# Altium PCB IcanStudioLive Controller mini fix.PcbDoc
Units mm, origin at the board's own origin, x right, y up, seen from the top; angles counter-clockwise.
Board outline 276.26 x 255.44 mm, 2 copper layers (Top Layer, Bottom Layer); 24 components, 42 nets, 133 pads, 2 vias.
Unrouted connection lines stored in the file: 2.
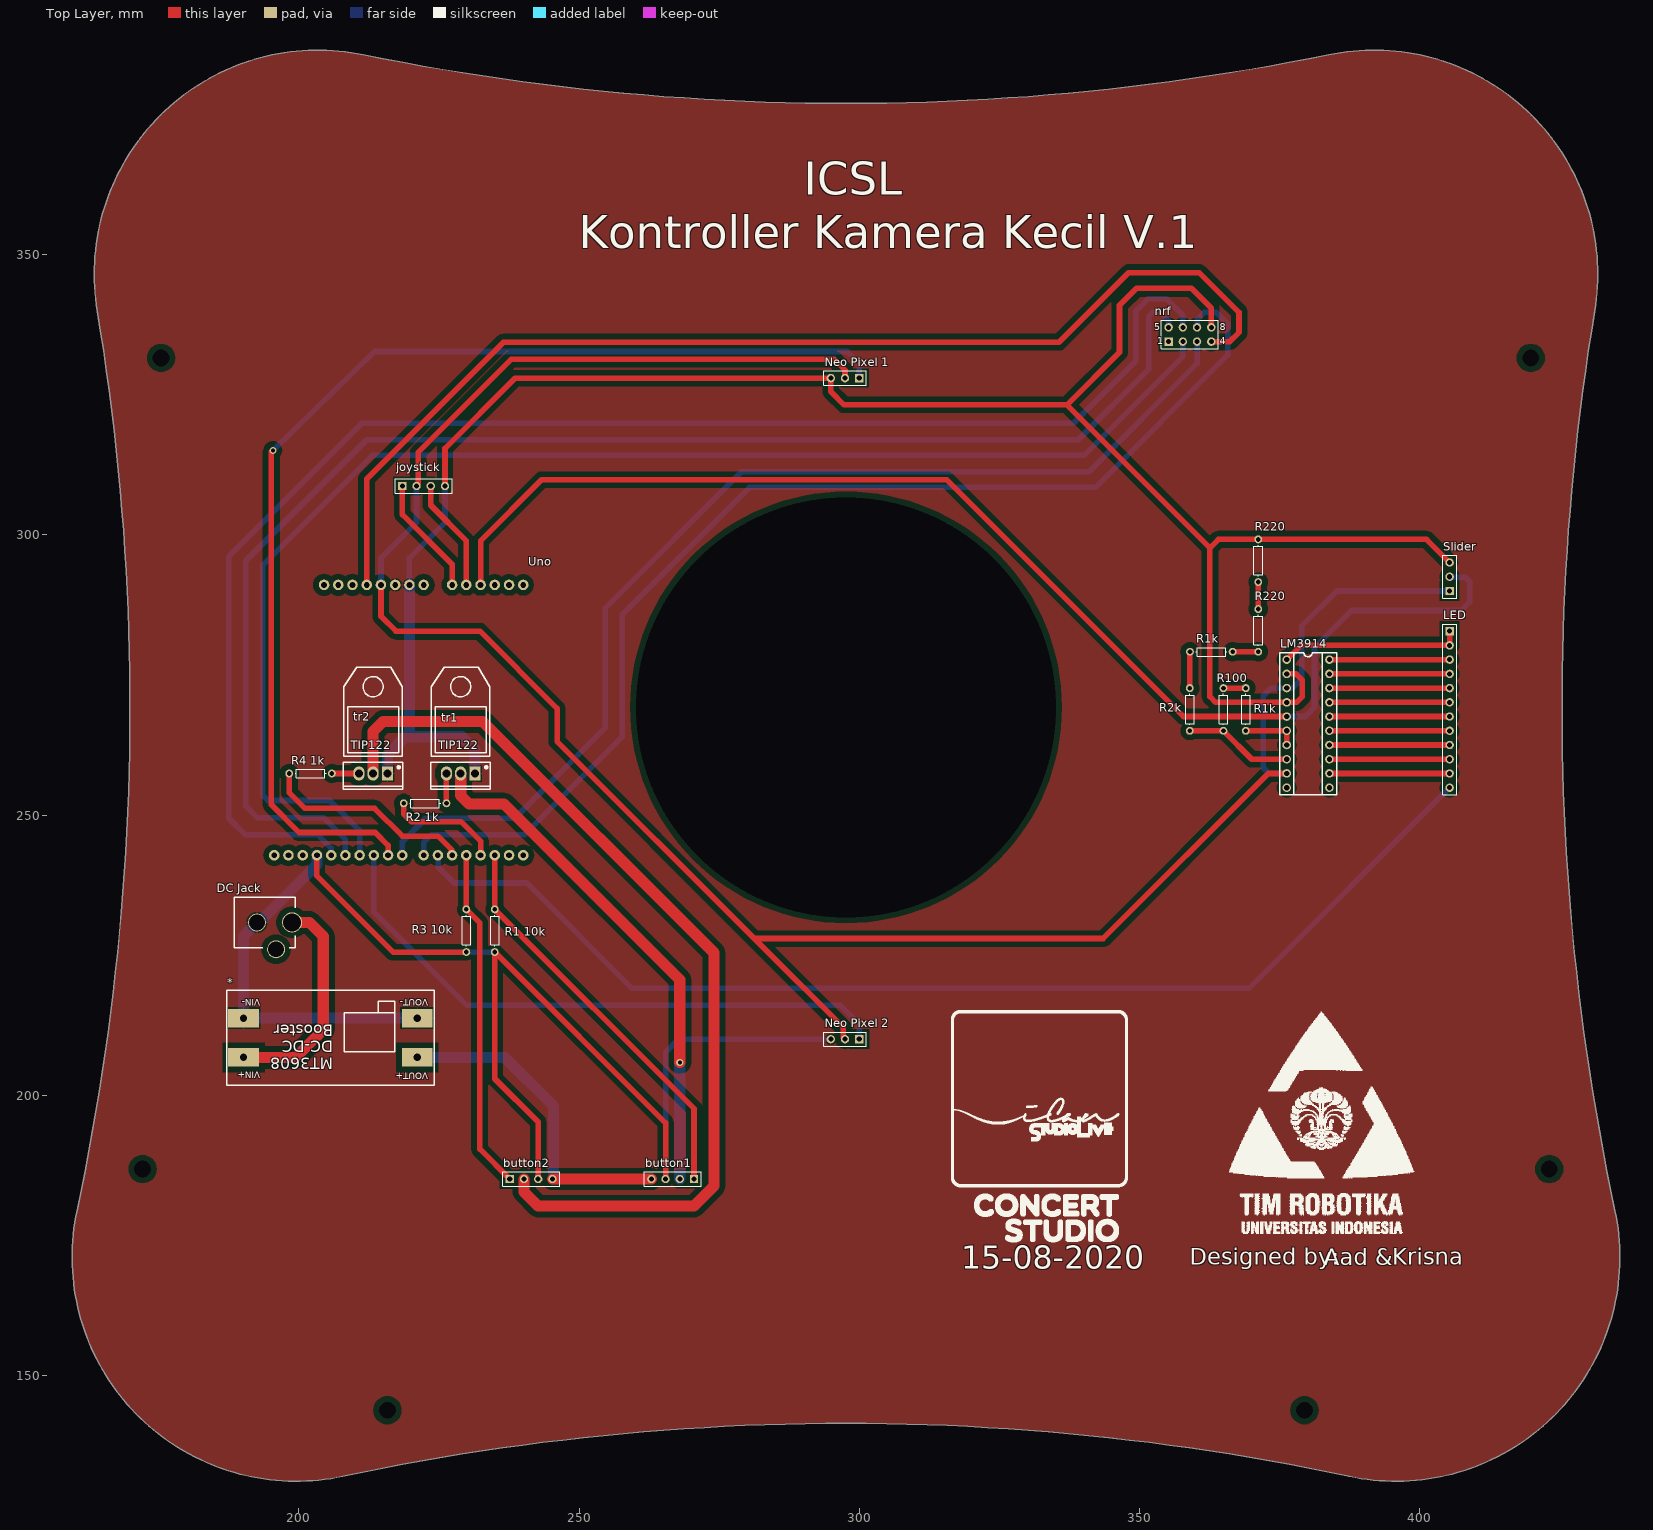
[diagram p0: Top Layer view]
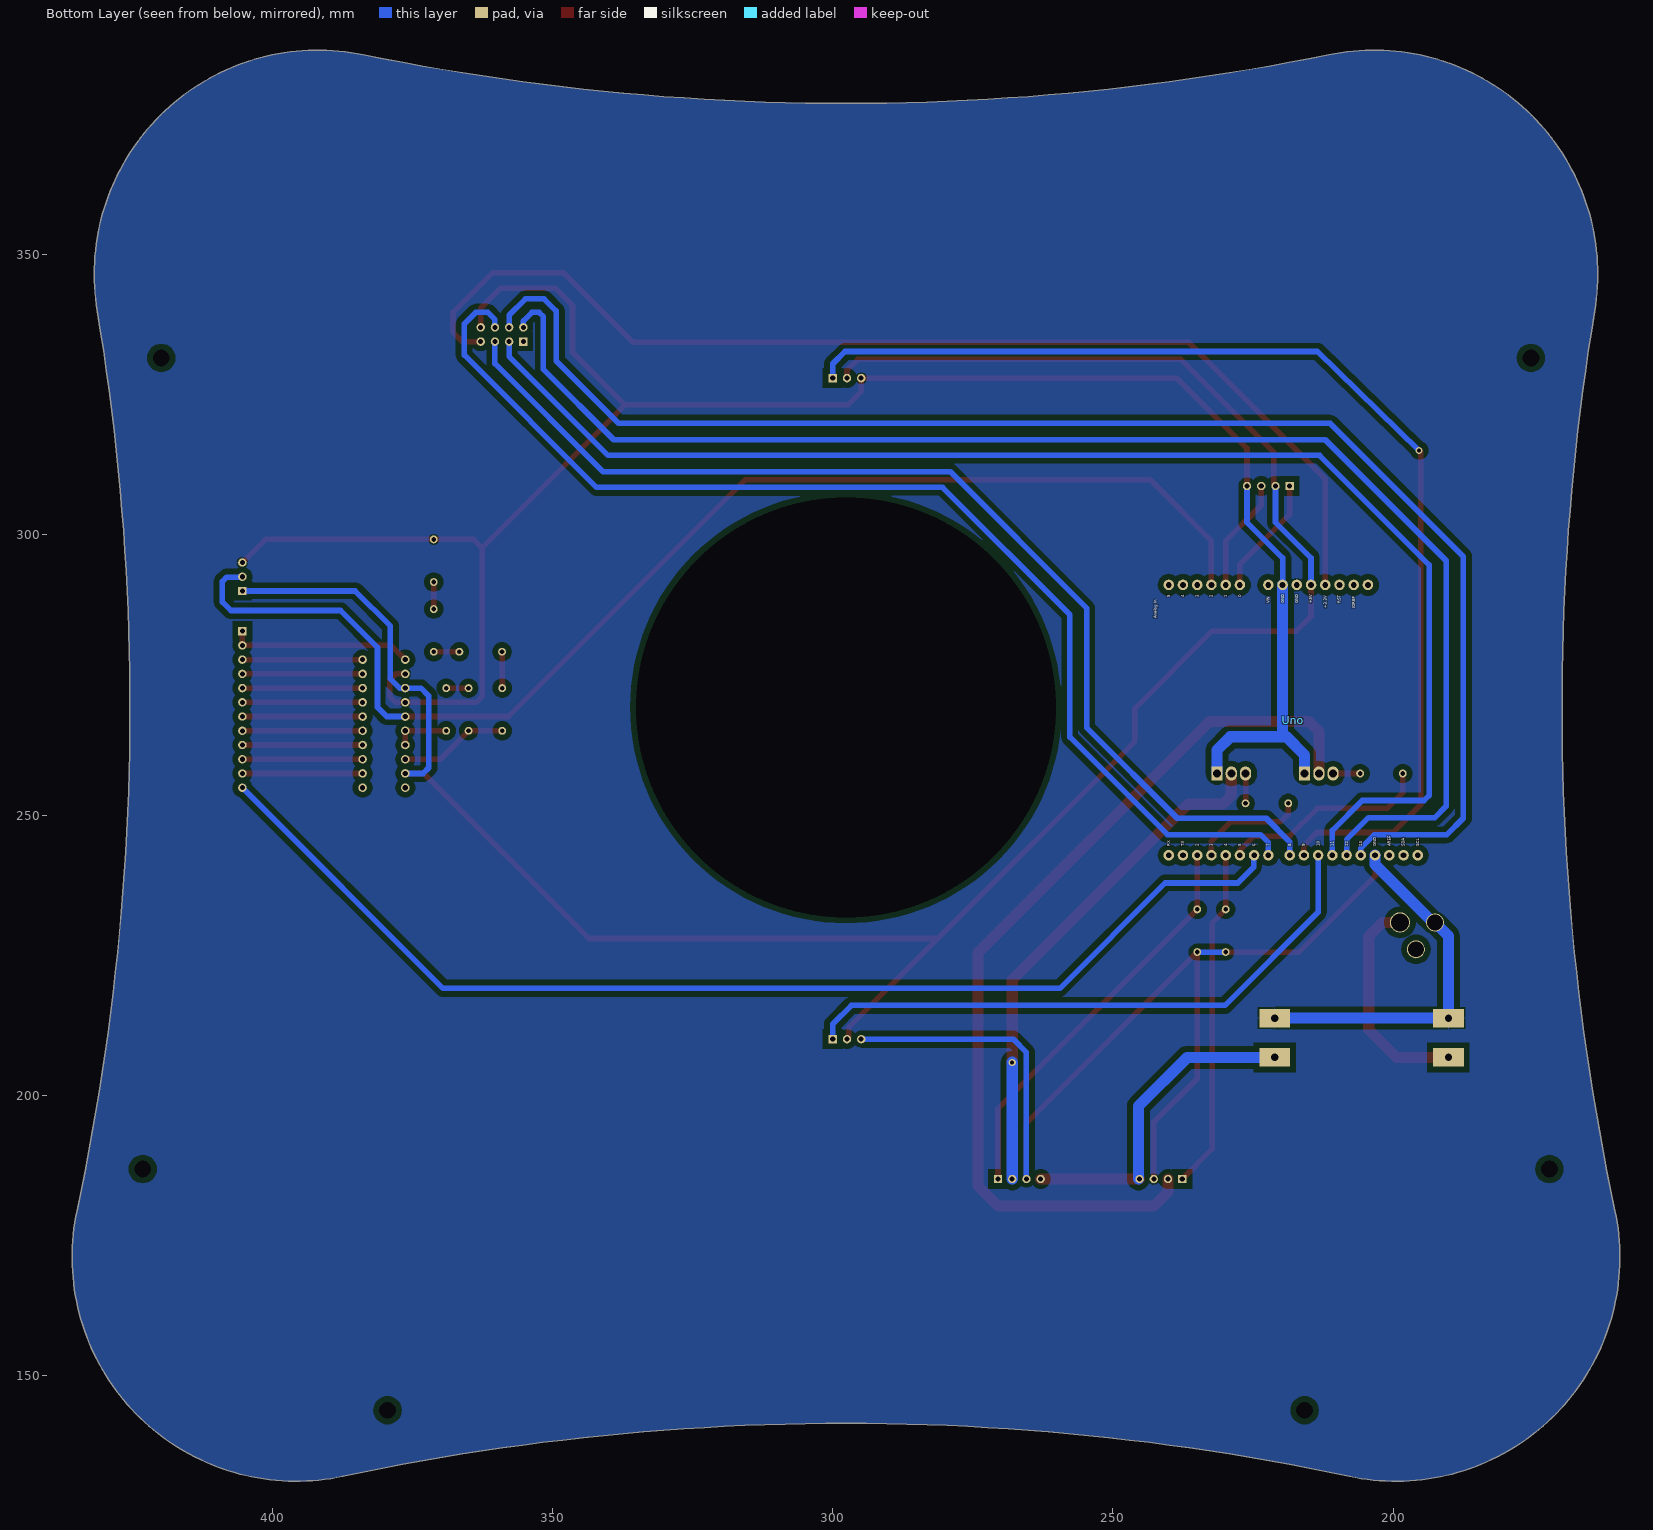
[diagram p1: Bottom Layer view, seen from below]

## Layer stack, top to bottom
Top Solder: solder mask 0.0102, Solder Resist, Dk 3.5
Top Layer: signal copper 0.0356
Dielectric 1: dielectric 0.32, FR-4, Dk 4.8
Bottom Layer: signal copper 0.0356
Bottom Solder: solder mask 0.0102, Solder Resist, Dk 3.5

## Board outline
160.382,179.426 ccw(c199.505,171.099) 207.832,131.976 cw(c297.637,-289.963) 387.442,131.976 ccw(c395.769,171.099) 434.893,179.426 cw(c856.831,269.231) 431.283,339.981 ccw(c391.824,346.541) 383.832,385.734 cw(c297.637,808.425) 211.442,385.734 ccw(c203.45,346.541) 163.992,339.981 cw(c-261.557,269.231)

## Design rules (kind name [scope] priority, off if disabled: settings)
Clearance [All] p1: gap=1
ComponentClearance [All] p1: gap=0.025 collisioncheckmode=3 verticalgap=0.254 showdistances=FALSE
PolygonConnect [All] p1: connectstyle=Relief reliefconductorwidth=0.254 reliefentries=4 polygonreliefangle="90 Angle" airgapwidth=0.254
RoutingVias [All] p1: holewidth=0.711 width=1.27 viastyle="Through Hole" minholewidth=0.711 minwidth=1.27 maxholewidth=0.711 maxwidth=1.27
SolderMaskExpansion [All] p1: expansion=0.102
UnpouredPolygon [All] p1: allowunpoured=FALSE
Width [All] p1: maxlimit=2 minlimit=1 preferedwidth=1
28 further rules are at their usual default settings.

## Components (designator, comment, footprint, x,y, rotation, side; value= is the part's Value field where it differs from the comment)
* "MT3608" PCBComponent_1 -945.182,-998.793 r180 top
button1 "Header push button" HDR1X4 270.51,185.039 r180 top
button2 "Header push button" HDR1X4 237.617,185.039 r0 top
"DC Jack" "" "DC Jack" 1452.753,-1027.684 r270 top
joystick "Header joystick" HDR1X4 218.44,308.737 r0 top
LED "Header LED" HDR1X12 405.384,282.829 r270 top
LM3914 "DIP20" DIP20 376.301,277.749 r270 top
"Neo Pixel 1" "Header neo 1" HDR1X3 300,328 r180 top
"Neo Pixel 2" "Header neo 2" HDR1X3 300,210 r180 top
nrf "Header NRF" HDR2X4_CEN 355.219,334.518 r0 top
"R1 10k" "ResPull" AXIAL-0.3 234.95,229.362 r90 top
R1k "Res4" AXIAL-0.3 362.839,279.146 r180 top
R1k "Res1" AXIAL-0.3 369,268.85 r270 top
"R2 1k" "ResTR" AXIAL-0.3 222.504,252.095 r0 top
R2k "Res3" AXIAL-0.3 359,268.85 r270 top
"R3 10k" "ResPull" AXIAL-0.3 229.87,229.362 r90 top
"R4 1k" "ResTR" AXIAL-0.3 202.057,257.429 r0 top
R100 "Res2" AXIAL-0.3 365,268.85 r90 top
R220 "Res5" AXIAL-0.3 371.221,282.956 r270 top
R220 "Res6" AXIAL-0.3 371.221,295.402 r90 top
Slider "Header Slider" HDR1X3 405.384,290 r90 top
tr1 "TIP122" tip122 226.314,257.429 r270 top
tr2 "TIP122" tip122 210.693,257.429 r270 top
Uno "" "Arduino Uno R3" 1432.814,1482.09 r90 bottom

## Footprints (in the part's own frame and the unit in brackets; to place one, negate y for a bottom-side part, rotate by r counter-clockwise, add the part's x,y. Pads: shape width x height; smd on the part's side, far side on the other; paste and mask are expansions set on the pad)
"Arduino Uno R3" [mil]
  round 74 hole 40: 3.3V(-46890,-48060) 5V(-46890,-47960) A0(-46890,-47460) A1(-46890,-47360) A2(-46890,-47260) A3(-46890,-47160) A4(-46890,-47060) A5(-46890,-46960) AREF(-48790,-48510) D2(-48790,-47160) D3(-48790,-47260) D4(-48790,-47360) D5(-48790,-47460) D6(-48790,-47560) D7(-48790,-47660) D8(-48790,-47810) D9(-48790,-47910) D10(-48790,-48010) D11(-48790,-48110) D12(-48790,-48210) D13(-48790,-48310) GND@0(-46890,-47860) GND@1(-46890,-47760) GND@2(-48790,-48410) IOREF(-46890,-48260) NC(-46890,-48360) RES(-46890,-48160) RX(-48790,-46960) SCL(-48790,-48710) SDA(-48790,-48610) TX(-48790,-47060) VIN(-46890,-47660)
AXIAL-0.3 [mm] "Axial Device, Thru-Hole; 2 Leads; 0.3 in Pin Spacing"
  round 1.4 hole 0.85: 1(-3.81,0) 2(3.81,0)
  silkscreen extent -2.77,-0.76 2.77,0.76
"DC Jack" [mil]
  round 126 hole 110.2: GND(-49548,-49616) GNDBREAK(-49359,-49482)
  round 141.7 hole 126: PWR(-49548,-49370)
  silkscreen extent -49725,-49775 -49371,-49346
DIP20 [mil]
  round 60 hole 36: 1(0,0) 2(100,0) 3(200,0) 4(300,0) 5(400,0) 6(500,0) 7(600,0) 8(700,0) 9(800,0) 10(900,0) 11(900,300) 12(800,300) 13(700,300) 14(600,300) 15(500,300) 16(400,300) 17(300,300) 18(200,300) 19(100,300) 20(0,300)
  silkscreen extent -50,-50 950,350
HDR1X3 [mm] "Connector; Header; 3 Position"
  rect 1.5x1.5 hole 0.9: 1(0,0)
  round 1.5 hole 0.9: 2(2.54,0) 3(5.08,0)
  silkscreen extent -1.27,-1.27 6.35,1.27
HDR1X4 [mm] "Connector; Header; 4 Position"
  rect 1.5x1.5 hole 0.9: 1(0,0)
  round 1.5 hole 0.9: 2(2.54,0) 3(5.08,0) 4(7.62,0)
  silkscreen extent -1.27,-1.27 8.89,1.27
HDR1X12 [mm] "Connector; Header; 12 Position"
  rect 1.5x1.5 hole 0.9: 1(0,0)
  round 1.5 hole 0.9: 2(2.54,0) 3(5.08,0) 4(7.62,0) 5(10.16,0) 6(12.7,0) 7(15.24,0) 8(17.78,0) 9(20.32,0) 10(22.86,0) 11(25.4,0) 12(27.94,0)
  silkscreen extent -1.27,-1.27 29.21,1.27
HDR2X4_CEN [mm] "Connector; Header; 4x2 Position"
  rect 1.5x1.5 hole 0.9: 1(0,0)
  round 1.5 hole 0.9: 2(2.54,0) 3(5.08,0) 4(7.62,0) 5(0,2.54) 6(2.54,2.54) 7(5.08,2.54) 8(7.62,2.54)
  silkscreen extent -1.27,-1.27 8.89,3.81
PCBComponent_1 [mil]
  rect 216.5x130 hole 51.18: 1(-45916.89,-47462.57) 2(-45916.89,-47738.14) 3(-44696.39,-47738.14) 4(-44696.39,-47462.57)
  silkscreen extent -46035,-47935 -44578,-47266
tip122 [mm]
  oval 2.5x2 hole 1.4: 1(0,0) 2(0,2.54)
  rect 2.499x2.002 hole 1.4: 3(0,5.08)
  silkscreen extent -18.92,-2.76 2.8,7.84

## Part data
*: library part Component_1
button1 button2 joystick: library part "Header 4", "Header, 4-Pin"
"DC Jack": library part DCBARREL
LED: library part "Header 12", "Header, 12-Pin"
"Neo Pixel 1" "Neo Pixel 2" Slider: library part "Header 3", "Header, 3-Pin"
nrf: library part "Header 4X2A", "Header, 4-Pin, Dual row"
"R1 10k" R1k "R2 1k" R2k "R3 10k" "R4 1k" R100 R220 R220: library part Res1, "Resistor"
R1k: "Resistor"
tr1 tr2: library part 2N3904, "NPN General Purpose Amplifier"
Uno: library part ARDUINO_R3_SHIELD

## Free pads (board coordinates)
  round 0 hole 75: 0(297.637,269.231)
  round 1.524 hole 3 mask+2: 1(172.085,186.817) 1(175.387,331.597) 1(215.773,143.764) 1(379.476,143.764) 1(419.862,331.597) 1(423.164,186.817)

## Via types
v1: diameter 1.27, hole 0.711, Top Layer to Bottom Layer, 2 vias

## Nets (pads, with @x,y where several pads share a name; then routed paths per layer and width w, separated by ;. In a path a pad name is that pad's centre, name@x,y a point inside that pad or via, vN(x,y) a via of type N, cw(c..) or ccw(c..) an arc to the next point about the centre after c; other vN are vias at no path point)
3.3V: nrf.4 Uno.3.3V | length 202
  Top Layer w1: Uno.3.3V 212.09,310.007 236.474,334.391 335.661,334.391 348.107,346.837 360.68,346.837 367.792,339.725 367.792,336.169 366.141,334.518 nrf.4
12V: "DC Jack.PWR" *.4 | length 57.2
  Top Layer w2: *.4 199.39,206.756 204.343,211.709 204.343,228.346 201.854,230.835 198.755,230.835 ; 245.237,185.039 262.89,185.039
12VNEW: *.1 button1.4 button2.4 | length 40.9
  Bottom Layer w2: *.1 236.728,206.756 245.447,198.037 button2.4@245.447,185.039
A0: joystick.1 Uno.A0 | length 21.3
  Top Layer w1: joystick.1 218.44,303.657 227.33,294.767 Uno.A0
A1: joystick.3 Uno.A1 | length 20.3
  Top Layer w1: joystick.3 223.52,305.308 229.87,298.958 Uno.A1
A2: LM3914.5 Slider.2 Uno.A2 | length 228.7
  Top Layer w1: Uno.A2 232.41,298.958 243.332,309.88 315.595,309.88 357.886,267.589 LM3914.5
  Bottom Layer w1: LM3914.5 379.603,267.589 381.254,269.24 381.254,279.908 387.858,286.512 407.416,286.512 408.94,288.036 408.94,291.719 408.178,292.481 Slider.2@405.443,292.481
D2: "R1 10k.2" button1.1 Uno.D2 | length 72.5
  Top Layer w1: Uno.D2 234.95,233.172 270.51,197.612 button1.1
D3: "R2 1k.1" Uno.D3 | length 20.2
  Top Layer w1: 218.694,252.095 218.694,250.19 220.091,248.793 228.981,248.793 232.41,245.364 Uno.D3
D4: "R3 10k.2" button2.1 Uno.D4 | length 61
  Top Layer w1: Uno.D4 229.87,233.172 232.283,230.759 232.283,190.373 button2.1
D5: "R4 1k.1" Uno.D5 | length 37.5
  Top Layer w1: 198.247,257.429 198.247,254 201.041,251.206 213.487,251.206 218.44,246.253 224.811,246.253 227.23,243.835 Uno.D5@227.23,242.924
D6: LED.12 Uno.D6 | length 206.8
  Bottom Layer w1: Uno.D6 224.89,242.724 224.89,240.688 227.707,237.871 240.665,237.871 259.461,219.075 369.57,219.075 LED.12@405.193,254.698 ; LED.12@405.193,255.079 LED.12@405.193,254.698 ; LED.12 LED.12@405.193,254.698
D7: nrf.7 Uno.D7 | length 208.4
  Bottom Layer w1: Uno.D7 222.25,245.11 223.647,246.507 240.284,246.507 257.683,263.906 257.683,285.75 280.416,308.483 342.138,308.483 365.76,332.105 365.76,337.693 363.728,339.725 361.569,339.725 360.299,338.455 nrf.7
D8: nrf.3 Uno.D8 | length 196.1
  Bottom Layer w1: Uno.D8 218.44,245.237 222.631,249.428 238.506,249.428 254.635,265.557 254.635,286.893 279.019,311.277 340.995,311.277 360.299,330.581 nrf.3
D9: "Neo Pixel 1.1" Uno.D9 | length 204.3
  Top Layer w1: v1(195.326,315.087) 195.072,314.833 195.072,251.841 200.025,246.888 213.614,246.888 215.9,244.602 Uno.D9
  Bottom Layer w1: v1(195.326,315.087) 213.487,332.74 297.815,332.74 300,330.555 300,328
D10: "Neo Pixel 2.1" Uno.D10 | length 107.8
  Bottom Layer w1: Uno.D10 213.36,232.664 229.997,216.027 296.672,216.027 300,212.699 300,210
D11: nrf.2 Uno.D11 | length 247.7
  Bottom Layer w1: Uno.D11 210.82,247.269 205.486,252.603 194.437,252.603 193.548,253.492 193.548,294.64 213.106,314.198 340.106,314.198 357.759,331.851 nrf.2
D12: nrf.5 Uno.D12 | length 257.2
  Bottom Layer w1: Uno.D12 208.28,245.618 204.343,249.555 192.532,249.555 190.5,251.587 190.5,295.402 212.09,316.992 339.09,316.992 351.663,329.565 351.663,338.963 352.425,339.725 353.695,339.725 355.219,338.201 nrf.5
D13: nrf.6 Uno.D13 | length 266.4
  Bottom Layer w1: Uno.D13 205.74,244.094 203.327,246.507 190.373,246.507 187.452,249.428 187.452,296.164 211.201,319.913 338.201,319.913 349.377,331.089 349.377,339.979 351.536,342.138 354.838,342.138 357.759,339.217 nrf.6
GND: "DC Jack.GND" "Neo Pixel 1.3" "Neo Pixel 2.3" "R1 10k.1" "R3 10k.1" *.2 *.3 button1.3 button2.3 joystick.4 LM3914.2 LM3914.4 nrf.8 R220.2@371.221,299.212 Slider.3 tr1.3 tr2.3 Uno.GND@0 Uno.GND@1 Uno.GND@2 | length 630.7
  Top Layer w1: 203.2,242.824 203.2,239.141 216.789,225.552 229.87,225.552 ; joystick.4 226.06,315.468 238.592,328 294.92,328 294.92,325.602 297.307,323.215 337.058,323.215 ; button2.3 242.697,195.199 234.95,202.946 234.95,225.552 265.43,195.072 button1.3 ; nrf.8 362.839,340.487 359.283,344.043 349.504,344.043 346.456,340.995 346.456,332.613 337.058,323.215 ; LM3914.2 377.952,275.209 379.095,274.066 379.095,271.145 378.079,270.129 LM3914.4 363.601,270.129 362.585,271.145 362.585,297.688 ; Slider.3 401.252,299.212 371.221,299.212 364.109,299.212 362.585,297.688 ; 337.058,323.215 362.585,297.688
  Bottom Layer w1: 219.71,291.084 219.71,295.91 226.06,302.26 joystick.4 ; 229.87,225.552 234.95,225.552 ; button1.3 265.43,207.645 267.785,210 294.92,210
  Bottom Layer w2: 203.2,242.824 203.2,241.206 192.829,230.835 192.507,230.835 190.106,228.435 *.3 *.2 ; tr2.3 215.773,260.731 219.023,263.981 229.033,263.981 231.394,261.62 tr1.3 ; 219.71,264.668 219.71,291.084
LED2: LED.1 LED.2 LM3914.1 | length 32.7
  Top Layer w1: LM3914.1 378.841,280.289 LED.2 LED.1
LED3: LED.3 LM3914.20 | length 21.5
  Top Layer w1: LM3914.20 LED.3
LED4: LED.4 LM3914.19 | length 21.5
  Top Layer w1: LM3914.19 LED.4
LED5: LED.5 LM3914.18 | length 21.5
  Top Layer w1: LM3914.18 LED.5
LED6: LED.6 LM3914.17 | length 21.5
  Top Layer w1: LM3914.17 LED.6
LED7: LED.7 LM3914.16 | length 21.5
  Top Layer w1: LM3914.16 LED.7
LED8: LED.8 LM3914.15 | length 21.5
  Top Layer w1: LM3914.15 LED.8
LED9: LED.9 LM3914.14 | length 21.5
  Top Layer w1: LM3914.14 LED.9
LED10: LED.10 LM3914.13 | length 21.5
  Top Layer w1: LM3914.13 LED.10
LED11: LED.11 LM3914.12 | length 21.5
  Top Layer w1: LM3914.12 LED.11
Netbutton1_2: button1.2 tr1.2 | length 92.2
  Top Layer w2: tr1.2 228.854,253.492 230.378,251.968 236.601,251.968 267.97,220.599 v1(267.97,205.867)
  Bottom Layer w2: button1.2 v1(267.97,205.867)
Netbutton2_2: button2.2 tr2.2 | length 166.5
  Top Layer w2: tr2.2 213.233,264.922 215.011,266.7 232.791,266.7 274.066,225.425 274.066,183.769 270.51,180.213 242.697,180.213 240.157,182.753 button2.2
NetLM3914_6: LM3914.6 LM3914.7 R1k.2@369,265.04 | length 9.8
  Top Layer w1: R1k.2@369,265.04 LM3914.6@376.292,265.04 ; LM3914.7 LM3914.6
NetLM3914_8: LM3914.8 R2k.2 R100.1 | length 19.4
  Top Layer w1: R2k.2 R100.1 370.071,259.969 LM3914.8
NetR1k_1: R1k.1@366.649,279.146 R220.2@371.221,279.146 | length 4.6
  Top Layer w1: R1k.1@366.649,279.146 R220.2@371.221,279.146
NetR1k_1: R1k.1@369,272.66 R100.2 | length 4
  Top Layer w1: R100.2 R1k.1@369,272.66
NetR1k_2: R1k.2@359.029,279.146 R2k.1 | length 6.5
  Top Layer w1: R2k.1 R1k.2@359,279.117
"NetR2 1k_2": "R2 1k.2" tr1.1 | length 5.3
  Top Layer w1: 226.314,252.095 tr1.1
"NetR4 1k_2": "R4 1k.2" tr2.1 | length 4.8
  Top Layer w1: 205.867,257.429 tr2.1
NetR220_1: R220.1 | length 4.8
  Top Layer w1: R220.1@371.221,286.766 R220.1@371.221,291.592
RX: Uno.RX
TX: Uno.TX
VCC: "Neo Pixel 1.2" "Neo Pixel 2.2" joystick.2 LM3914.3 LM3914.9 Slider.1 Uno.5V | length 407.1
  Top Layer w1: Uno.5V 214.63,285.496 217.297,282.829 232.283,282.829 246.084,269.028 246.084,263.144 281.263,227.965 ; joystick.2 221.27,309.027 221.27,314.742 237.871,331.343 295.529,331.343 297.46,329.412 297.46,328 ; 297.46,210 297.17,210.29 297.17,212.058 281.263,227.965 ; LM3914.9 372.999,257.429 343.535,227.965 281.263,227.965
  Bottom Layer w1: Uno.5V 214.63,295.91 220.98,302.26 joystick.2 ; LM3914.9 373.126,257.429 372.11,258.445 372.11,271.272 373.507,272.669 LM3914.3 377.317,272.669 378.968,274.32 378.968,283.718 385.255,290.005 Slider.1@405.379,290.005
pads on no net: "DC Jack.GNDBREAK" LM3914.10 LM3914.11 nrf.1 Uno.A3 Uno.A4 Uno.A5 Uno.AREF Uno.IOREF Uno.NC Uno.RES Uno.SCL Uno.SDA Uno.VIN

## Polygon pours and split planes (outlines as drawn)
GND on Top Layer "Top Layer-No Net" (solid, pour order 3): 160.382,179.426 ccw(c199.505,171.099) 207.832,131.976 cw(c297.637,-289.963) 387.442,131.976 ccw(c395.769,171.099) 434.893,179.426 cw(c856.831,269.231) 431.283,339.981 ccw(c391.824,346.541) 383.832,385.734 cw(c297.637,808.425) 211.442,385.734 ccw(c203.45,346.541) 163.992,339.981 cw(c-261.557,269.231)
GND on Bottom Layer "Top Layer-No Net1" (solid, pour order 6): 160.382,179.426 ccw(c199.505,171.099) 207.832,131.976 cw(c297.637,-289.963) 387.442,131.976 ccw(c395.769,171.099) 434.893,179.426 cw(c856.831,269.231) 431.283,339.981 ccw(c391.824,346.541) 383.832,385.734 cw(c297.637,808.425) 211.442,385.734 ccw(c203.45,346.541) 163.992,339.981 cw(c-261.557,269.231)

## Silkscreen, mask and mechanical layers (free items; w line width, h text height)
Top Overlay:
  drawing of 8669 lines, arcs and shapes, not listed
  text "ICSL" at 290.068,358.775 h10
  text "Kontroller Kamera Kecil V.1" at 249.936,349.25 h10
  text "Designed by:" at 359.029,168.783 h5
  text "Krisna" at 395.097,168.783 h5
  text "Aad &" at 383.032,168.656 h5
  text "15-08-2020" at 318.186,167.691 h7
Mechanical 5:
  circle w0.013: c297.637,269.231 r45.5
  circle w0.013: c297.637,269.231 r37.5
  circle w0.013: c172.075,186.841 r1.5
  circle w0.013: c175.401,331.621 r1.5
  circle w0.013: c379.524,143.764 r1.5
  circle w0.013: c215.751,143.764 r1.5
  circle w0.013: c419.873,331.621 r1.5
  circle w0.013: c423.199,186.841 r1.5
  lines w0.013: 160.382,179.426 ccw(c-261.557,269.231) 163.992,339.981 cw(c203.45,346.541) 211.442,385.734 ccw(c297.637,808.425) 383.832,385.734 cw(c391.824,346.541) 431.283,339.981 ccw(c856.831,269.231) 434.893,179.426 cw(c395.769,171.099) 387.442,131.976 ccw(c297.637,-289.963) 207.832,131.976 cw(c199.505,171.099) 160.382,179.426

## Dimensions
335.137,269.231 to 343.137,269.231 on Mechanical 5
297.637,269.231 to 321.183,273.304 on Mechanical 5

## Text inside footprints (layer, text, board x,y; h text height)
*: Top Overlay "DC-DC" at 206.105,209.68 h2.03 r180; Top Overlay "VOUT+" at 223.105,203.973 h1.2 r180; Top Overlay "VOUT-" at 223.106,217.155 h1.2 r180; Top Overlay "VIN+" at 193.106,204.155 h1.2 r180; Top Overlay "VIN-" at 193.106,217.155 h1.2 r180; Top Overlay "Booster" at 206.106,212.571 h2.03 r180
"DC Jack": Mechanical 15 "DC 2.0/2.1" at 186.182,234.128 h0.51 r272
nrf: Top Overlay "5" at 352.679,336.55 h1.27; Top Overlay "1" at 353.187,334.01 h1.27; Top Overlay "4" at 364.363,334.01 h1.27; Top Overlay "8" at 364.363,336.55 h1.27
Uno: Mechanical 15 "RST" at 237.49,267.589 h0.76 r270; Mechanical 15 "ISP" at 240.665,265.176 h0.76 r270; Bottom Overlay "GND" at 216.916,287.782 h0.51 r270; Bottom Overlay "GND" at 219.456,287.782 h0.51 r270; Bottom Overlay "+5V" at 214.376,287.782 h0.51 r270; Bottom Overlay "RST" at 209.296,287.782 h0.51 r270; Bottom Overlay "VIN" at 221.996,287.782 h0.51 r270; Bottom Overlay "+3.3V" at 211.836,286.893 h0.51 r270; Bottom Overlay "0" at 227.076,288.925 h0.51 r270; Bottom Overlay "1" at 229.616,288.925 h0.51 r270; Bottom Overlay "2" at 232.156,288.925 h0.51 r270; Bottom Overlay "3" at 234.696,288.925 h0.51 r270; Bottom Overlay "4" at 237.236,288.925 h0.51 r270; Bottom Overlay "5" at 239.776,288.925 h0.51 r270; Bottom Overlay "Analog In" at 242.189,285.115 h0.51 r270; Bottom Overlay "GND" at 202.946,244.475 h0.51 r270; Bottom Overlay "13" at 205.486,244.475 h0.51 r270; Bottom Overlay "12" at 208.026,244.475 h0.51 r270; Bottom Overlay "11" at 210.566,244.475 h0.51 r270; Bottom Overlay "AREF" at 200.406,244.475 h0.51 r270; Bottom Overlay "10" at 213.106,244.475 h0.51 r270; Bottom Overlay "9" at 215.646,244.475 h0.51 r265; Bottom Overlay "8" at 218.186,244.475 h0.51 r270; Bottom Overlay "7" at 221.996,244.475 h0.51 r270; Bottom Overlay "6" at 224.536,244.475 h0.51 r265; Bottom Overlay "5" at 227.076,244.475 h0.51 r270; Bottom Overlay "4" at 229.616,244.475 h0.51 r270; Bottom Overlay "3" at 232.156,244.475 h0.51 r270; Bottom Overlay "2" at 234.696,244.475 h0.51 r270; Bottom Overlay "TX" at 237.236,244.475 h0.51 r270; Bottom Overlay "RX" at 239.776,244.475 h0.51 r270; Bottom Overlay "SDA" at 197.866,244.475 h0.51 r270; Bottom Overlay "SCL" at 195.326,244.475 h0.51 r270; Bottom Overlay "IOREF" at 206.756,286.893 h0.51 r270